# Altium PCB RasPagerC9000.PcbDoc
Units mm, origin at the board's own origin, x right, y up, seen from the top; angles counter-clockwise.
Board outline 39.62 x 39.37 mm, 2 copper layers (Top Layer, Bottom Layer); 23 components, 28 nets, 105 pads, 0 vias.
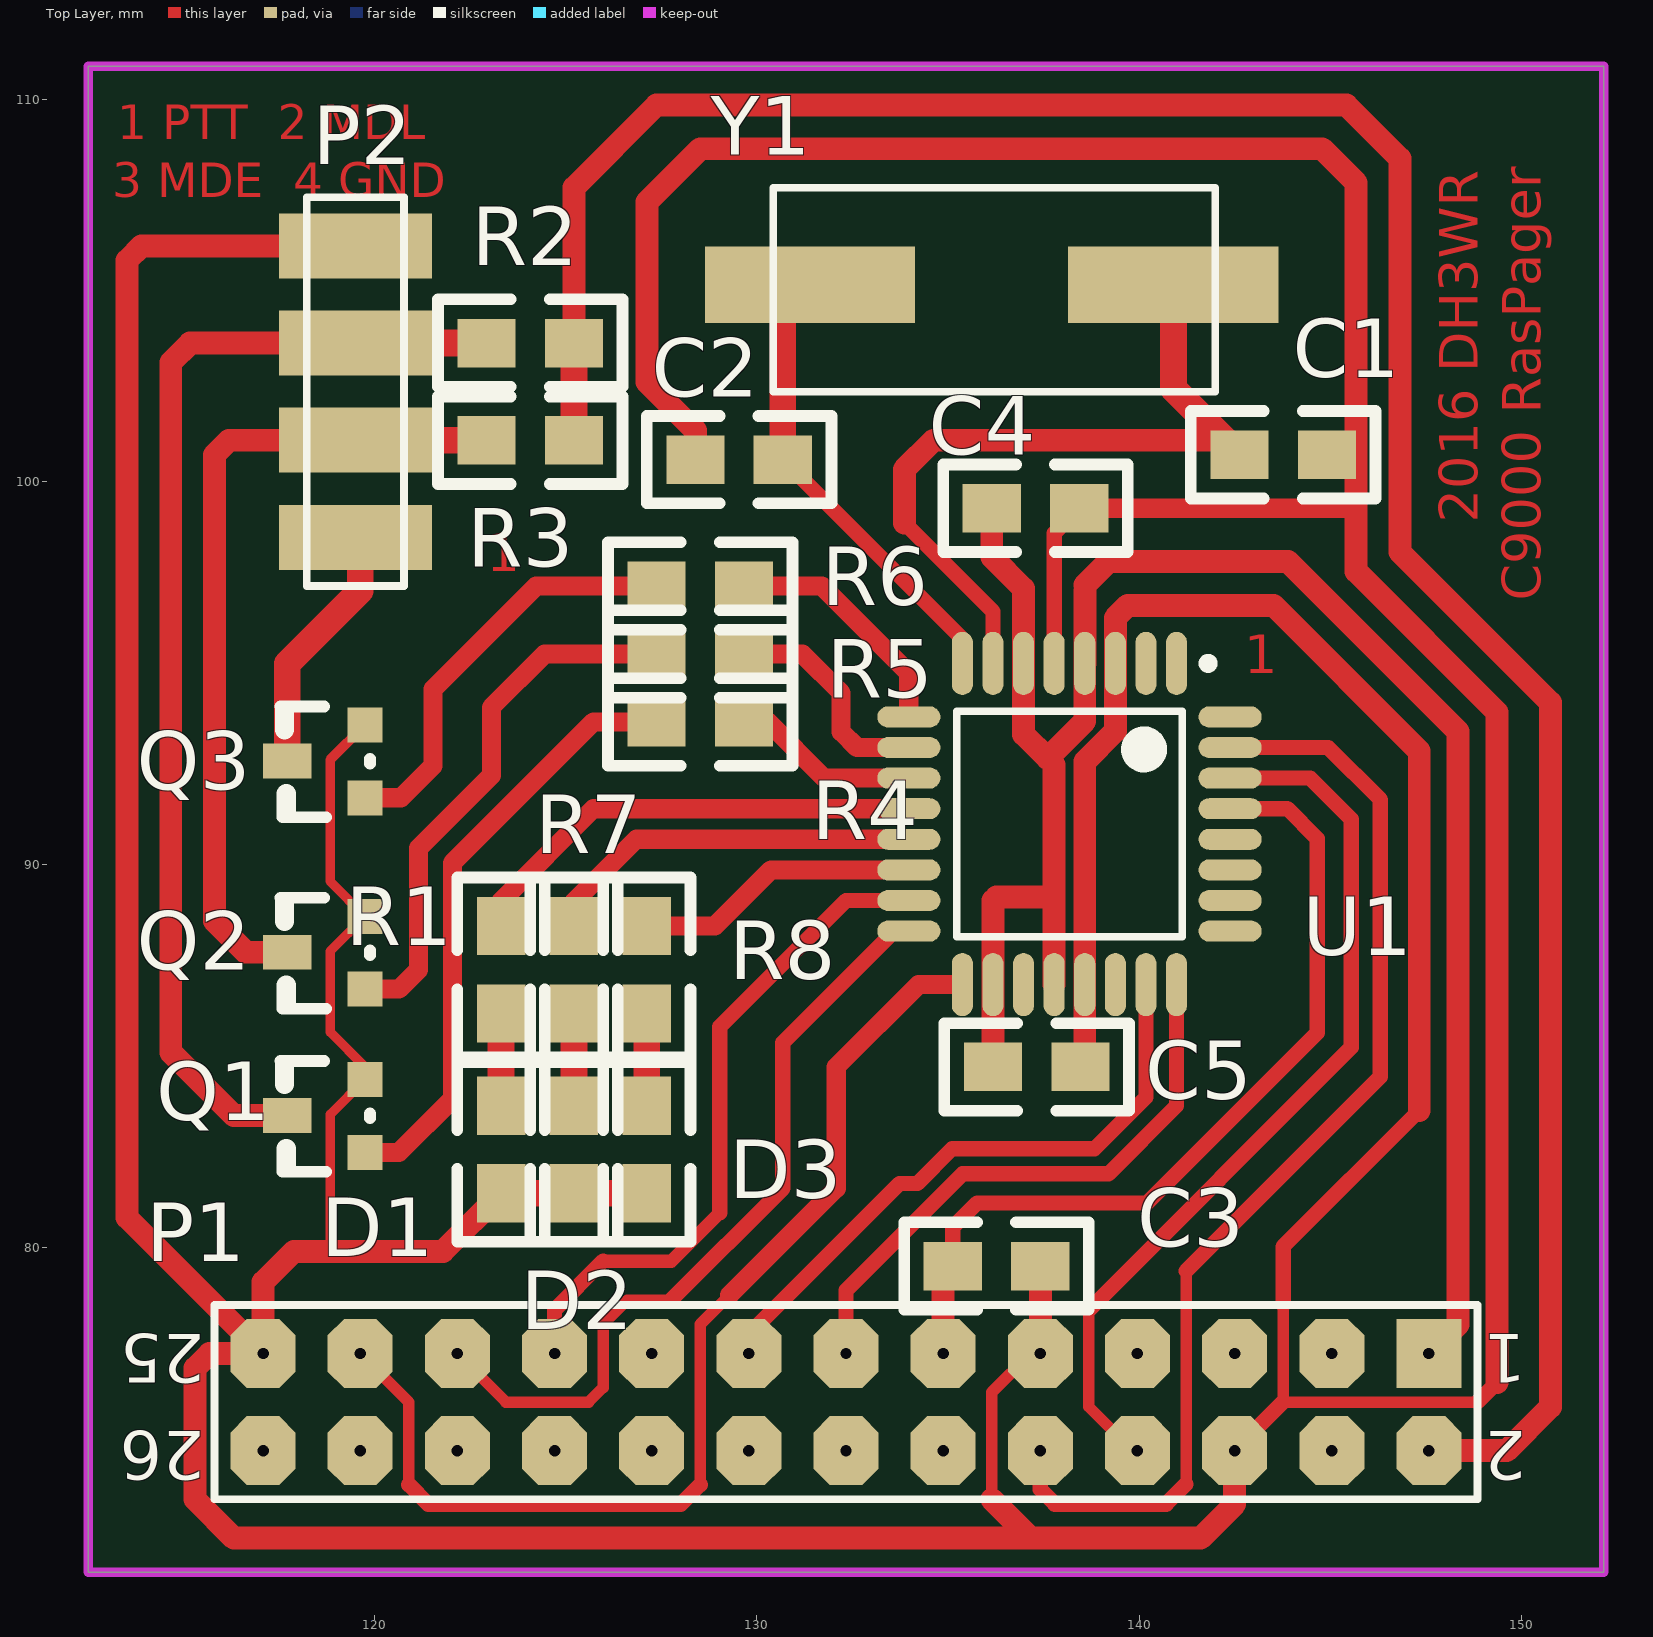
[diagram p0: Top Layer view]
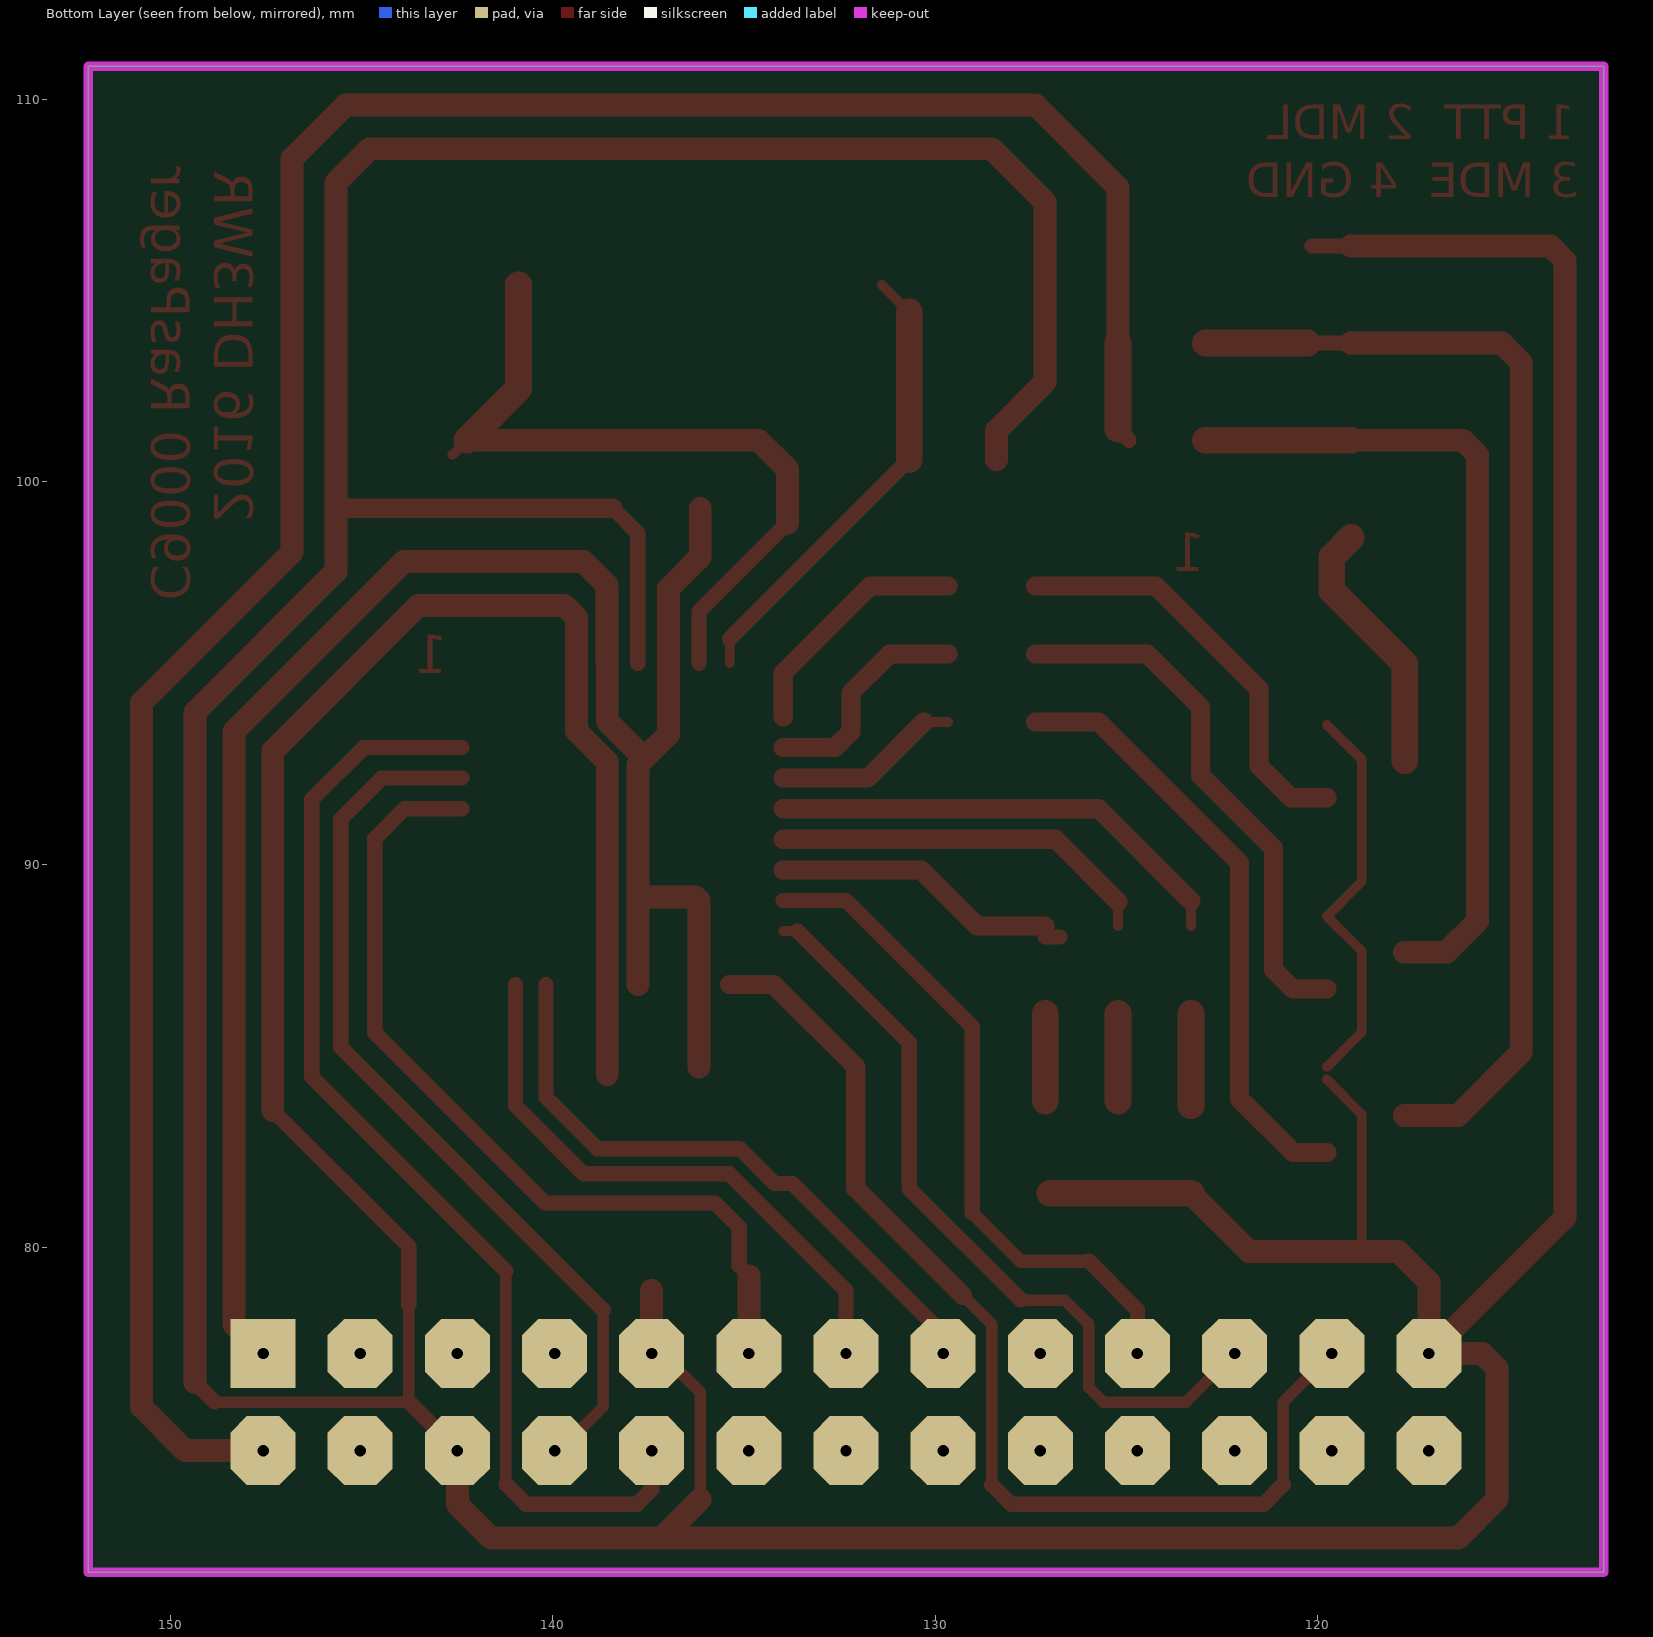
[diagram p1: Bottom Layer view, seen from below]

## Layer stack, top to bottom
Top Solder: solder mask 0.0102, Solder Resist, Dk 3.5
Top Layer: signal copper 0.0356
Dielectric 1: dielectric 0.32, FR-4, Dk 4.8
Bottom Layer: signal copper 0.0356
Bottom Solder: solder mask 0.0102, Solder Resist, Dk 3.5

## Board outline
112.522,71.501 112.522,110.871 152.146,110.871 152.146,71.501

## Design rules (kind name [scope] priority, off if disabled: settings)
Clearance [All] p1: gap=0.254
PolygonConnect [All] p1: connectstyle=Relief reliefconductorwidth=0.254 reliefentries=4 polygonreliefangle="90 Angle" airgapwidth=0.254
RoomDefinition RasPagerC9000 [InComponentClass('RasPagerC9000')] p1: confinementstyle=ConfineIn formatcopy=TRUE lockcomponents=FALSE outline 112.522,71.501 152.146,71.501 152.146,109.728 112.522,109.728
RoutingVias [All] p1: holewidth=0.711 width=1.27 viastyle="Through Hole" minholewidth=0.711 minwidth=1.27 maxholewidth=0.711 maxwidth=1.27
SolderMaskExpansion [All] p1: expansion=0.102
Width [All] p1: maxlimit=0.254 minlimit=0.254 preferedwidth=0.254
30 further rules are at their usual default settings.

## Components (designator, comment, footprint, x,y, rotation, side; value= is the part's Value field where it differs from the comment)
C1 "Cap" 0805 144.907,100.711 r180 top
C2 "Cap" 0805 128.397,100.584 r0 top
C3 "Cap" 0805 137.414,79.502 r180 top
C4 "Cap" 0805 138.43,99.314 r180 top
C5 "Cap" 0805 138.462,84.709 r180 top
D1 "TOP LED rot" 0805 123.317,83.693 r270 top
D2 "TOP LED gelb" 0805 125.222,83.693 r270 top
D3 "TOP LED grün" 0805 127.127,83.693 r270 top
P1 "GPIO RaspberryPi" HDR2X13 147.574,77.216 r180 top
P2 "C9000_Connector" HDR1X4 119.507,98.552 r90 top
Q1 "BC847CLT1" SOT-23 119.761,82.474 r90 top
Q2 "BC847CLT1" SOT-23 119.761,86.741 r90 top
Q3 "BC847CLT1" SOT-23 119.761,91.745 r90 top
R1 "" 0805 123.317,86.106 r90 top
R2 "" 0805 122.936,103.632 r0 top
R3 "" 0805 122.936,101.092 r0 top
R4 "" 0805 129.667,93.726 r180 top
R5 "" 0805 129.667,95.504 r180 top
R6 "" 0805 129.667,97.282 r180 top
R7 "" 0805 125.222,86.106 r90 top
R8 "" 0805 127.127,86.106 r90 top
U1 "ATmega8L-8AC" 32A_N 138.176,91.059 r270 top
Y1 "8 MHz" "HC49/4H SMX" 136.144,105.156 r90 top

## Footprints (in the part's own frame and the unit in brackets; to place one, negate y for a bottom-side part, rotate by r counter-clockwise, add the part's x,y. Pads: shape width x height; smd on the part's side, far side on the other; paste and mask are expansions set on the pad)
32A_N [mm] "Thin QFP, 32-Leads, Body 7x7mm, Pitch 0.8mm, IPC Medium Density"
  oval 1.65x0.55 smd: 1(-4.2,2.8) 2(-4.2,2) 3(-4.2,1.2) 4(-4.2,0.4) 5(-4.2,-0.4) 6(-4.2,-1.2) 7(-4.2,-2) 8(-4.2,-2.8) 17(4.2,-2.8) 18(4.2,-2) 19(4.2,-1.2) 20(4.2,-0.4) 21(4.2,0.4) 22(4.2,1.2) 23(4.2,2) 24(4.2,2.8)
  oval 0.55x1.65 smd: 9(-2.8,-4.2) 10(-2,-4.2) 11(-1.2,-4.2) 12(-0.4,-4.2) 13(0.4,-4.2) 14(1.2,-4.2) 15(2,-4.2) 16(2.8,-4.2) 25(2.8,4.2) 26(2,4.2) 27(1.2,4.2) 28(0.4,4.2) 29(-0.4,4.2) 30(-1.2,4.2) 31(-2,4.2) 32(-2.8,4.2)
  silkscreen extent -4.32,-2.95 2.95,3.75, body extent -3.5,-3.5 3.5,3.5, height 1.2
0805 [mil]
  rect 60x50 smd: 1(0,0) 2(90,0)
  silkscreen extent -50,-45 140,45
"HC49/4H SMX" [mm]
  rect 2x5.5 smd: 1(0,-4.75) 2(0,4.75)
  silkscreen extent -2.79,-5.84 2.54,5.71
HDR1X4 [mm] "Connector; Header; 4 Position"
  rect 1.7x4 smd: 1(0,0) 2(2.54,0) 3(5.08,0) 4(7.62,0)
  silkscreen extent -1.27,-1.27 8.89,1.27
HDR2X13 [mm] "Connector; Header; 13x2 Position"
  rect 1.7x1.8 hole 0.3: 1(0,0)
  oct 1.7x1.8 hole 0.3: 2(0,2.54) 3(2.54,0) 4(2.54,2.54) 5(5.08,0) 6(5.08,2.54) 7(7.62,0) 8(7.62,2.54) 9(10.16,0) 10(10.16,2.54) 11(12.7,0) 12(12.7,2.54) 13(15.24,0) 14(15.24,2.54) 15(17.78,0) 16(17.78,2.54) 17(20.32,0) 18(20.32,2.54) 19(22.86,0) 20(22.86,2.54) 21(25.4,0) 22(25.4,2.54) 23(27.94,0) 24(27.94,2.54) 25(30.48,0) 26(30.48,2.54)
  silkscreen extent -1.27,-1.27 31.75,3.81
SOT-23 [mil]
  rect 36x36 smd: 1(0,0) 2(75,0)
  rect 36x50 smd: 3(38,80)
  silkscreen extent -20,-5 94,87

## Part data
C1 C2 C3 C4 C5: "Capacitor"
D1 D2 D3: library part LED_2
P1: library part "Header 13X2", "Header, 13-Pin, Dual row"
P2: library part "Header 4", "Header, 4-Pin"
Q1 Q2 Q3: "General Purpose Transistor NPN Silicon"
R1 R2 R3 R4 R5 R6 R7 R8: library part Res2, "Resistor"
U1: "8-Bit AVR Microcontroller with 8K Bytes of In-System Programmable Flash Memory"
Y1: library part XTAL, "Crystal Oscillator"

## Nets (pads, with @x,y where several pads share a name; then routed paths per layer and width w, separated by ;. In a path a pad name is that pad's centre, name@x,y a point inside that pad or via, vN(x,y) a via of type N, cw(c..) or ccw(c..) an arc to the next point about the centre after c; other vN are vias at no path point)
5V: P1.2 R2.2 R3.2 | length 67.7
  Top Layer w0.4: R3.2@124.937,101.092 R3.2@125.222,101.377
  Top Layer w0.6: R2.2 125.222,107.696 127.381,109.855 145.415,109.855 146.812,108.458 146.812,98.171 150.749,94.234 150.749,75.819 149.606,74.676 P1.2
  Top Layer w0.7: R3.2@125.222,101.377 R2.2
GND: C1.1 C2.1 C3.1 C4.1 C5.1 D1.2 D2.2 D3.2 P1.6 P1.9 P1.25 P2.4 Q1.2 Q2.2 Q3.2 U1.3 U1.5 U1.21 | length 226.7
  Top Layer w0.25: 118.85,80.836 118.85,83.468 Q1.2 ; 118.85,90.424 118.85,89.557 Q2.2 118.85,87.735 118.85,85.62 Q1.2@119.761,84.709
  Top Layer w0.254: 118.85,80.836 118.85,79.905 118.872,79.883 ; 118.85,90.424 118.85,92.739 Q3.2 ; D3.2@127,81.407 D3.2@127.127,81.534 ; 137.776,98.66 C4.1@137.826,98.71
  Top Layer w0.3: 136.144,73.406 136.144,76.2 P1.9@137.16,77.216 ; 143.764,78.486 143.764,75.946 148.844,75.946
  Top Layer w0.4: P2.4@119.126,106.172 P2.4 P2.4@120.142,106.172 ; P1.9@137.16,77.216 P1.9 ; U1.5 137.776,98.66 ; C4.1@137.826,98.71 C4.1 ; C5.1@138.526,84.455 C5.1@138.576,84.505 ; P1.6 143.764,75.946 ; 143.764,78.486 143.764,80.01 147.32,83.566 ; 148.844,75.946 149.352,76.454
  Top Layer w0.5: C4.1 145.669,99.314
  Top Layer w0.6: P2.4@119.126,106.172 113.919,106.172 113.538,105.791 113.538,80.772 P1.25 ; D1.2 121.793,79.883 118.872,79.883 117.897,79.883 117.094,79.08 P1.25 ; C2.1 128.397,101.346 127.127,102.616 127.127,107.315 128.524,108.712 144.78,108.712 145.669,107.823 145.669,99.314 145.669,97.663 149.352,93.98 149.352,76.454 ; 136.144,73.406 137.16,72.39 ; P1.9 C3.1@137.414,78.867 ; C5.1@138.576,84.505 U1.21 138.576,92.691 139.376,93.491 U1.3 139.376,96.45 139.7,96.774 143.51,96.774 147.32,92.964 147.32,83.566 ; P1.6 142.494,73.279 141.605,72.39 137.16,72.39 ; P1.25 115.697,77.216 115.316,76.835 115.316,73.406 116.332,72.39 137.16,72.39
  Top Layer w0.7: D1.2 D2.2 D3.2@127,81.407
LED_GELB: R7.2 U1.13 | length 10.1
  Top Layer w0.254: R7.2 R7.2@125.222,89.027
  Top Layer w0.5: R7.2@125.222,89.027 126.854,90.659 U1.13
LED_GRüN: R8.2 U1.14 | length 7.8
  Top Layer w0.4: R8.2@126.746,88.107 R8.2@127.127,88.107
  Top Layer w0.5: R8.2 128.905,88.392 130.372,89.859 U1.14
LED_ROT: R1.2 U1.12 | length 12.3
  Top Layer w0.254: R1.2 R1.2@123.317,89.046
  Top Layer w0.5: R1.2@123.317,89.046 125.73,91.459 U1.12
MDE_ATMEGA: R4.1 U1.11 | length 4.9
  Top Layer w0.254: R4.1 R4.1@130.302,93.726
  Top Layer w0.5: R4.1@130.302,93.726 131.769,92.259 U1.11
MDE_C9000: P2.3 Q1.3 R2.1 | length 30.1
  Top Layer w0.4: P2.3@119.126,103.632 P2.3 P2.3@120.142,103.632
  Top Layer w0.6: Q1.3 116.332,83.439 114.681,85.09 114.681,103.124 115.189,103.632 P2.3@119.126,103.632
  Top Layer w0.7: P2.3@120.269,103.632 R2.1
MDL_ATMEGA: R5.1 U1.10 | length 6
  Top Layer w0.4: U1.10@133.944,93.091 U1.10
  Top Layer w0.5: R5.1 131.191,95.504 132.207,94.488 132.207,93.472 132.62,93.059 U1.10
MDL_C9000: P2.2 Q2.3 R3.1 | length 21.7
  Top Layer w0.6: Q2.3 116.637,87.706 115.824,88.519 115.824,100.711 116.205,101.092 P2.2@119.126,101.092
  Top Layer w0.7: P2.2@119.126,101.092 P2.2 R3.1
MISO: P1.21 U1.16 | length 20.6
  Top Layer w0.254: U1.16@133.598,88.259 U1.16
  Top Layer w0.3: P1.21 123.444,75.946 125.603,75.946 125.984,76.327 125.984,77.978 126.619,78.613 127.762,78.613
  Top Layer w0.4: 127.762,78.613 130.683,81.534 130.683,85.344 U1.16@133.598,88.259
MOSI: P1.19 U1.15 | length 17.7
  Top Layer w0.35: 125.984,79.629 127.762,79.629 129.032,80.899
  Top Layer w0.4: P1.19 124.714,78.359 125.984,79.629 ; 129.032,80.899 129.032,85.757 132.334,89.059 U1.15
NetC1_2: C1.2 U1.7 Y1.1 | length 19.9
  Top Layer w0.254: 136.176,96.52 136.176,96.615 ; C1.2@142.24,101.092 C1.2
  Top Layer w0.4: 133.858,98.933 136.176,96.615 ; U1.7 136.176,96.52
  Top Layer w0.6: 133.858,98.933 133.858,100.33 134.62,101.092 C1.2@142.24,101.092
  Top Layer w0.7: Y1.1 140.894,102.438 C1.2@142.24,101.092
NetC2_2: C2.2 U1.8 Y1.2 | length 12.1
  Top Layer w0.254: Y1.2@130.683,104.445 Y1.2 ; U1.8 U1.8@135.376,95.891
  Top Layer w0.4: C2.2 U1.8@135.376,95.891
  Top Layer w0.7: C2.2 Y1.2@130.683,104.445
NetD1_1: D1.1 R1.1 | length 2.4
  Top Layer w0.7: D1.1 R1.1
NetD2_1: D2.1 R7.1 | length 2.3
  Top Layer w0.7: D2.1@125.222,83.82 R7.1
NetD3_1: D3.1 R8.1 | length 2.3
  Top Layer w0.7: D3.1@127.127,83.82 R8.1
NetQ1_1: Q1.1 R4.2 | length 15.9
  Top Layer w0.5: Q1.1 120.65,82.474 122.047,83.871 122.047,90.043 125.73,93.726 R4.2
NetQ2_1: Q2.1 R5.2 | length 14.2
  Top Layer w0.5: Q2.1 120.65,86.741 121.158,87.249 121.158,90.424 123.063,92.329 123.063,94.107 124.46,95.504 R5.2
NetQ3_1: Q3.1 R6.2 | length 11.1
  Top Layer w0.5: Q3.1 120.701,91.745 121.539,92.583 121.539,94.584 124.237,97.282 R6.2
PTT_ATMEGA: R6.1 U1.9 | length 6.4
  Top Layer w0.5: R6.1 131.699,97.282 133.976,95.005 U1.9
PTT_C9000: P2.1 Q3.3 | length 6.8
  Top Layer w0.7: Q3.3 117.729,95.25 119.634,97.155 119.634,98.044 P2.1@119.126,98.552
PTT_RASPI: P1.13 U1.24 | length 15.5
  Top Layer w0.4: P1.13 132.334,78.867 135.382,81.915 139.198,81.915 140.976,83.693 U1.24
RST: C3.2 P1.11 U1.29 | length 22.7
  Top Layer w0.254: C3.2@134.874,79.248 C3.2
  Top Layer w0.4: C3.2 135.128,80.518 135.763,81.153 140.208,81.153 144.653,85.598 144.653,90.678 143.872,91.459 U1.29
  Top Layer w0.6: P1.11 C3.2@134.874,79.248
RX_UART: P1.8 U1.30 | length 23.6
  Top Layer w0.3: 138.684,78.359 138.684,75.819 P1.8@139.827,74.676
  Top Layer w0.4: 138.684,78.359 145.542,85.217 145.542,91.186 144.469,92.259 U1.30 ; P1.8@139.827,74.676 P1.8
SCLK: P1.23 U1.17 | length 28.6
  Top Layer w0.3: P1.23 120.904,75.946 120.904,73.787 ; 128.524,73.787 128.524,77.978 129.286,78.74
  Top Layer w0.4: 120.904,73.787 121.412,73.279 128.016,73.279 128.524,73.787
  Top Layer w0.5: 129.286,78.74 132.08,81.534 132.08,84.709 134.23,86.859 U1.17
SENDDATA: P1.15 U1.23 | length 16.4
  Top Layer w0.254: P1.15 P1.15@129.794,77.724
  Top Layer w0.4: P1.15@129.794,77.724 133.731,81.661 134.203,81.661 135.111,82.569 138.83,82.569 140.176,83.915 U1.23
TX_UART: P1.10 U1.31 | length 29.7
  Top Layer w0.3: 141.224,73.799 141.224,79.375
  Top Layer w0.4: P1.10 137.414,73.66 137.795,73.279 140.704,73.279 141.224,73.799 ; 141.224,79.375 146.304,84.455 146.304,91.694 144.939,93.059 U1.31
VCC: C4.2 C5.2 P1.1 U1.4 U1.6 U1.18 U1.20 | length 52.5
  Top Layer w0.254: 136.176,89.059 136.271,89.154 ; 138.584,97.155 138.584,97.309
  Top Layer w0.4: 137.605,92.773 137.776,92.602 ; U1.4 U1.4@138.584,95.259
  Top Layer w0.6: C4.2 136.144,98.044 136.976,97.212 U1.6 136.976,93.402 137.605,92.773 138.576,93.745 U1.4 ; C5.2 U1.18 136.176,89.059 ; 136.271,89.154 137.776,89.154 ; U1.20 137.776,89.154 ; 137.776,92.602 137.776,89.154 ; U1.4@138.584,95.259 138.584,97.155 ; 138.584,97.309 139.192,97.917 143.891,97.917 148.336,93.472 148.336,77.978 P1.1
pads on no net: P1.3 P1.4 P1.5 P1.7 P1.12 P1.14 P1.16 P1.17 P1.18 P1.20 P1.22 P1.24 P1.26 U1.1 U1.2 U1.19 U1.22 U1.25 U1.26 U1.27 U1.28 U1.32

## Keep-outs
Keep-Out Layer:
  the board outline again, w0.254

## Other copper
Top Layer:
  text "1 PTT  2 MDL" at 113.284,108.966 h0.9
  text "3 MDE  4 GND" at 113.157,107.442 h0.9
  text "2016 DH3WR" at 148.844,98.933 h1 r90
  text "1" at 122.936,97.663 h1
  text "C9000 RasPager" at 150.495,96.901 h1 r90
  text "1" at 142.748,94.996 h1

## Text inside footprints (layer, text, board x,y; h text height)
P1: Top Overlay "26" at 115.57,75.184 h1.27 r180; Top Overlay "25" at 115.57,77.724 h1.27 r180; Top Overlay "1" at 150.114,77.724 h1.27 r180; Top Overlay "2" at 150.114,75.184 h1.27 r180